# EAGLE board PCB (EAGLE 9.7.0)
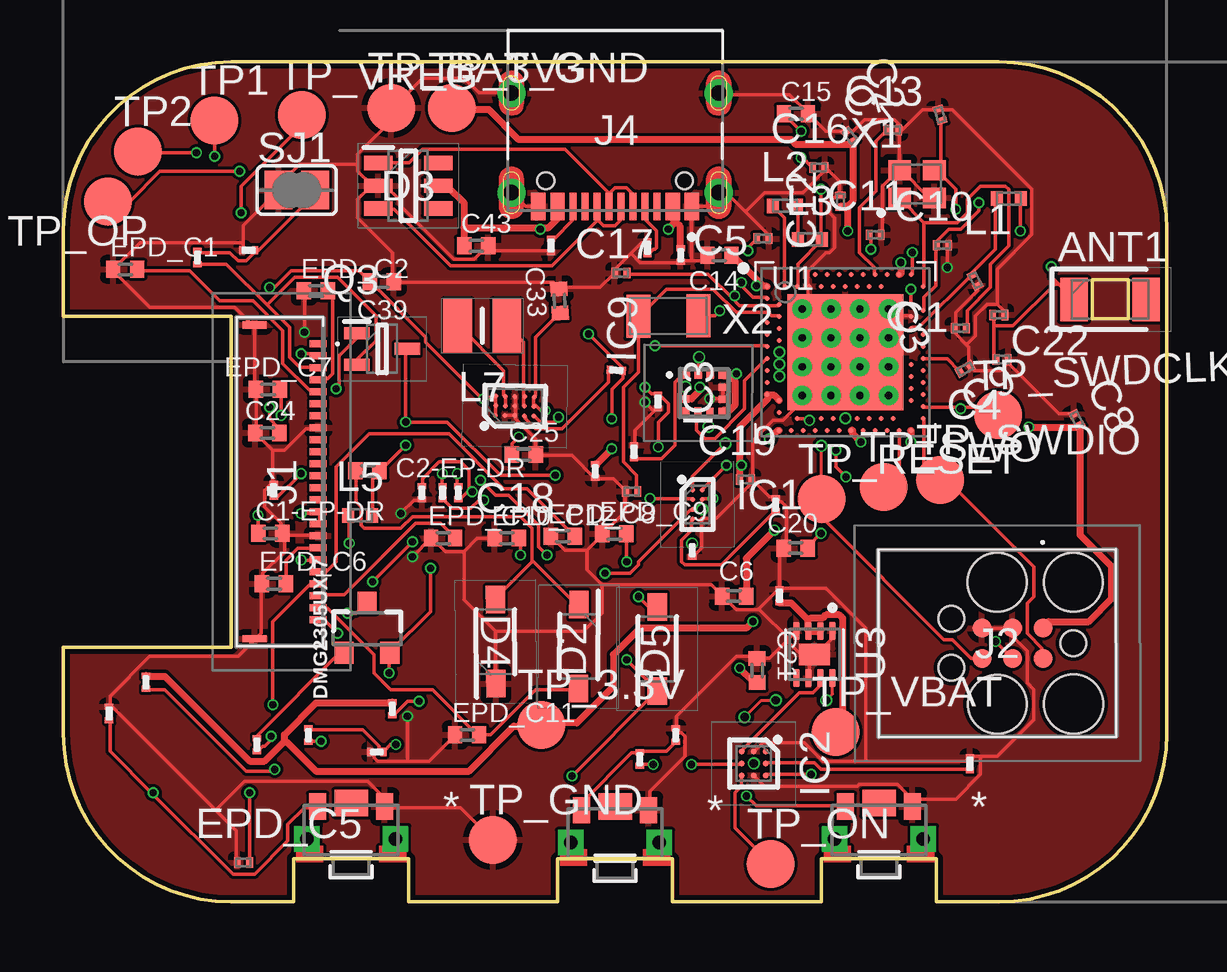
[diagram p0: board, top side]
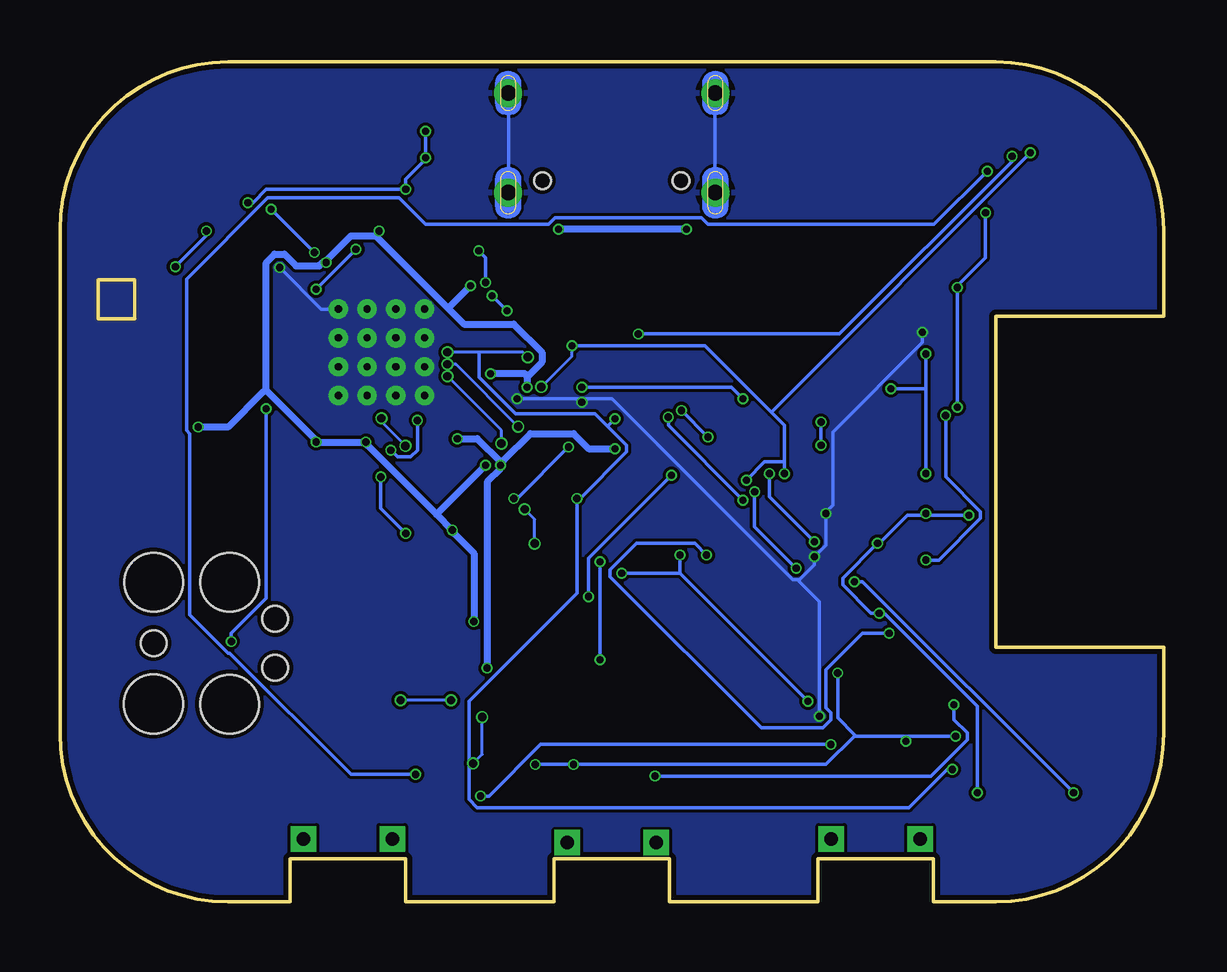
[diagram p1: board, bottom side, seen from below]

Size 46 x 35 mm. Coordinates in mm from the lower left corner, seen from the top.
Outline: 7,35 39,35 arc-90 46,28 46,7 arc-90 39,0 36.4,0 36.4,1.8 31.6,1.8 31.6,0 25.4,0 25.4,1.8 20.6,1.8 20.6,0 14.4,0 14.4,1.8 9.6,1.8 9.6,0 7,0 arc-90 0,7 0,10.6 7,10.6 7,24.4 0,24.4 0,28 arc-90 7,35
Copper layers (1*16): Top 0.035mm / dielectric 1.6mm / Bottom 0.035mm
Design rules "jlcpcb-2layers.dru": minimum track width 5mil, minimum drill 0.3mm, track to track 5mil, track to pad 5mil, pad to pad 5mil, via to via 5mil, smd to smd 5mil, copper to edge 0.2mm, drill to drill 6mil, minimum pad ring 10mil, minimum via ring 3mil, stop-mask expansion 4mil, vias tented up to drill 0mil, thermal gap 10mil
Net classes: 0 default: width 0.15 mm; 1 hi: width 0.3 mm
Milling: 4 lines

## Footprints (pad centres in the part's own frame; a part is rotated, then mirrored left to right if it is on the bottom)
2450AT18B100E_ANTC3216X140N = smd 1.15 x 1.8: 1 -1.5,0; 2 1.5,0
NORDIC_NRF_3_RESC0201_L = smd 0.28 x 0.43: 1 -0.255,0; 2 0.255,0
PERFECT_0402_0402 = smd 0.6 x 0.7: 1 -0.5,0; 2 0.5,0
GRM011R60J152KE01L_1_0201 = smd 0.35 x 0.25: 1 0,0.275; 2 0,-0.275
ESP32_C6_LIBRARY_5_SOD3716X135N = smd 1.15 x 0.8: 1 -1.75,0; 2 1.75,0
ESP32_C6_LIBRARY_3_SOT95P280X145-6N = smd 1.2 x 0.6: 1 -1.25,0.95; 2 -1.25,0; 3 -1.25,-0.95; 4 1.25,-0.95; 5 1.25,0; 6 1.25,0.95
ESP32_C6_LIBRARY_4_ESP32_C6_LIBRARY_4_ESP32_C6_LIBRARY_4_ESP32_C6_LIBRARY_4_ESP32_WROVER_SPARKFUN-DISCRETESEMI_SOT23-3 = smd 0.8 x 0.9: 1 -0.95,-1; 2 0.95,-1; 3 0,1.1
BQ25180YBGR_BGA8C40P2X4_100X155X50 = smd 0.2 x 0.2: A1 -0.2,0.6; A2 0.2,0.6; B1 -0.2,0.2; B2 0.2,0.2; C1 -0.2,-0.2; C2 0.2,-0.2; D1 -0.2,-0.6; D2 0.2,-0.6
DRV2605YZFR_BGA9C50P3X3_144X144X62 = smd 0.25 x 0.25: A1 -0.5,0.5; A2 0,0.5; A3 0.5,0.5; B1 -0.5,0; B2 0,0; B3 0.5,0; C1 -0.5,-0.5; C2 0,-0.5; C3 0.5,-0.5
BMA423_BMA423 = smd 0.3 x 0.35: 1 -0.75,-0.775; 2 -0.25,-0.775; 3 0.25,-0.775; 4 0.75,-0.775; 7 0.75,0.775; 8 0.25,0.775; 9 -0.25,0.775; 10 -0.75,0.775 | smd 0.35 x 0.3: 5 0.775,-0.25; 6 0.775,0.25; 11 -0.775,0.25; 12 -0.775,-0.25
RT6160AWSC_BGA15C40P3X5_140X230X60 = smd 0.216 x 0.216: A1 -0.4,0.8; A2 0,0.8; A3 0.4,0.8; B1 -0.4,0.4; B2 0,0.4; B3 0.4,0.4; C1 -0.4,0; C2 0,0; C3 0.4,0; D1 -0.4,-0.4; D2 0,-0.4; D3 0.4,-0.4; E1 -0.4,-0.8; E2 0,-0.8; E3 0.4,-0.8
503480-2400_5034802400 = smd 0.3 x 0.7: 1 -5.75,1.525; 2 -5.25,1.525; 3 -4.75,1.525; 4 -4.25,1.525; 5 -3.75,1.525; 6 -3.25,1.525; 7 -2.75,1.525; 8 -2.25,1.525; 9 -1.75,1.525; 10 -1.25,1.525; 11 -0.75,1.525; 12 -0.25,1.525; 13 0.25,1.525; 14 0.75,1.525; 15 1.25,1.525; 16 1.75,1.525; 17 2.25,1.525; 18 2.75,1.525; 19 3.25,1.525; 20 3.75,1.525; 21 4.25,1.525; 22 4.75,1.525; 23 5.25,1.525; 24 5.75,1.525 | smd 0.3 x 1: MP1 -6.54,-1.125; MP2 6.54,-1.125
TC2030-IDC_TC2030IDC = smd 0.783 x 0.783: 1 -0.953,-0.635; 2 -0.953,0.635; 3 0.317,-0.635; 4 0.317,0.635; 5 1.588,-0.635; 6 1.588,0.635 | hole 2.451: -2.223,-2.54; -2.223,2.54; 0.952,-2.54; 0.952,2.54 | hole 1.067: -2.223,0; 2.857,-1.016; 2.857,1.016
KH-TYPE-C-16P_KINGHELM_KH-TYPE-C-16P = smd 0.6 x 1.15: A1_B12 -3.2,4.725; A4_B9 -2.4,4.725; A9_B4 2.4,4.725; A12_B1 3.2,4.725 | smd 0.3 x 1.15: A5 -1.25,4.725; A6 -0.25,4.725; A7 0.25,4.725; A8 1.25,4.725; B5 1.75,4.725; B6 0.75,4.725; B7 -0.75,4.725; B8 -1.75,4.725 | drill 0.65 pad 1.05: SH1 -4.32,0; SH2 4.32,0; SH3 -4.32,4.15; SH4 4.32,4.15 | hole 0.7: -2.89,3.65; 2.89,3.65
NORDIC_NRF_2_RESC0402_L = smd 0.5 x 0.6: 1 -0.5,0; 2 0.5,0
MLP2016SR47MT0S1_INDC2016X100N = smd 1.2 x 2.2: 1 -1.028,0; 2 1.028,0
ESP32_C6_LIBRARY_6_SOT65P210X110-3N = smd 1.05 x 0.5: 1 -1.05,0.65; 2 -1.05,-0.65; 3 1.05,0
CPF0201D7K68C1_0201 = smd 0.35 x 0.25: 1 0,0.275; 2 0,-0.275
ESP32_C6_LIBRARY_7_JUMPER_SJ = smd 1.168 x 1.6: 1 -0.762,0; 2 0.762,0
2025-10-22_07-23-44_LIBRARY_SW_EVP-AKE31A_PAN = smd 0.711 x 1.092: 1 -1.4,-0.972; 2 1.4,-0.972 | drill 0.559 pad 0.914 square: 3 -1.848,0.381; 4 1.848,0.381 | smd 1.397 x 1.092: 5 0,-1.124
HECTOR_WATCH_1_TP20R = smd 2 x 2: TP 0,0
NORDIC_NRF_4_AQFN50P700X700X85_HS-74N = smd 4.85 x 4.85: P$74 0,0 | drill 0.3 pad 0.6: P$75 -1.8,1.8; P$76 -0.6,1.8; P$77 0.6,1.8; P$78 1.8,1.8; P$79 -1.8,0.6; P$80 -0.6,0.6; P$81 0.6,0.6; P$82 1.8,0.6; P$83 -1.8,-0.6; P$84 -0.6,-0.6; P$85 0.6,-0.6; P$86 1.8,-0.6; P$87 -1.8,-1.8; P$88 -0.6,-1.8; P$89 0.6,-1.8; P$90 1.8,-1.8 | smd 0.2 x 0.2: P$A8 -1.25,3.25; P$A10 -0.75,3.25; P$A12 -0.25,3.25; P$A14 0.25,3.25; P$A16 0.75,3.25; P$A18 1.25,3.25; P$A20 1.75,3.25; P$A22 2.25,3.25; P$A23 2.75,3.25; P$AA24 3.25,-2.25; P$AB2 -2.75,-2.5; P$AC5 -2,-2.75; P$AC9 -1,-2.75; P$AC11 -0.5,-2.75; P$AC13 0,-2.75; P$AC15 0.5,-2.75; P$AC17 1,-2.75; P$AC19 1.5,-2.75; P$AC21 2,-2.75; P$AC24 3.25,-2.75; P$AD2 -2.75,-3.25; P$AD4 -2.25,-3.25; P$AD6 -1.75,-3.25; P$AD8 -1.25,-3.25; P$AD10 -0.75,-3.25; P$AD12 -0.25,-3.25; P$AD14 0.25,-3.25; P$AD16 0.75,-3.25; P$AD18 1.25,-3.25; P$AD20 1.75,-3.25; P$AD22 2.25,-3.25; P$AD23 2.75,-3.25; P$B1 -3.25,2.75; P$B3 -2.5,2.75; P$B5 -2,2.75; P$B7 -1.5,2.75; P$B9 -1,2.75; P$B11 -0.5,2.75; P$B13 0,2.75; P$B15 0.5,2.75; P$B17 1,2.75; P$B19 1.5,2.75; P$B24 3.25,2.75; P$C1 -3.25,2.25; P$D2 -2.75,2; P$D23 2.75,2; P$E24 3.25,1.75; P$F2 -2.75,1.5; P$F23 2.75,1.5; P$G1 -3.25,1.25; P$H2 -2.75,1; P$H23 2.75,1; P$J1 -3.25,0.75; P$J24 3.25,0.75; P$K2 -2.75,0.5; P$L1 -3.25,0.25; P$L24 3.25,0.25; P$M2 -2.75,0; P$N1 -3.25,-0.25; P$N24 3.25,-0.25; P$P2 -2.75,-0.5; P$P23 2.75,-0.5; P$R1 -3.25,-0.75; P$R24 3.25,-0.75; P$T2 -2.75,-1; P$T23 2.75,-1; P$U1 -3.25,-1.25; P$U24 3.25,-1.25; P$V23 2.75,-1.5; P$W1 -3.25,-1.75; P$W24 3.25,-1.75; P$Y2 -2.75,-2; P$Y23 2.75,-2
ESP32_C6_LIBRARY_SON50P200X200X80-9N = smd 0.76 x 0.27: 1 -0.985,0.75; 2 -0.985,0.25; 3 -0.985,-0.25; 4 -0.985,-0.75; 5 0.985,-0.75; 6 0.985,-0.25; 7 0.985,0.25; 8 0.985,0.75 | smd 0.9 x 1.3: 9 0,0
NORDIC_NRF_BT-XTAL_2016_N = smd 0.95 x 0.85: 1 -0.725,-0.575; 2 0.725,-0.575; 3 0.725,0.575; 4 -0.725,0.575
NORDIC_NRF_1_XTAL_3215_N = smd 1 x 1.8: 1 -1.25,0; 2 1.25,0

## Placement (x,y rotation side)
ANT1  2450AT18B100E  [2450AT18B100E_ANTC3216X140N]  43.63,25.1 0 top
C1  12pF  [NORDIC_NRF_3_RESC0201_L]  37.39,23.9 180 top
C1-EP-DR  10uF  [PERFECT_0402_0402]  8.63,15.36 0 top
C2  12pF  [NORDIC_NRF_3_RESC0201_L]  36.54,32.8 106.3 top
C2-EP-DR  4.7uF/25V  [PERFECT_0402_0402]  12.68,17.96 0 top
C3  1pF  [NORDIC_NRF_3_RESC0201_L]  38.01,25.9 296.8 top
C4  1pF  [NORDIC_NRF_3_RESC0201_L]  39.13,22.6 0 top
C5  100nF  [NORDIC_NRF_3_RESC0201_L]  29.16,27.64 0 top
C6  4.7µF  [PERFECT_0402_0402]  27.96,12.74 180 top
C7  100nF  [NORDIC_NRF_3_RESC0201_L]  32.79,31.9 127.8 top
C8  100nF  [NORDIC_NRF_3_RESC0201_L]  42.24,20.1 117.1 top
C9  820pF  [NORDIC_NRF_3_RESC0201_L]  37.59,22.2 29.3 top
C10  N.C  [NORDIC_NRF_3_RESC0201_L]  36.65,27.36 0 top
C11  100pF  [NORDIC_NRF_3_RESC0201_L]  33.84,27.8 0 top
C12  100nF  [NORDIC_NRF_3_RESC0201_L]  32.39,29.2 90 top
C13  N.C.  [NORDIC_NRF_3_RESC0201_L]  34.57,32.16 0 top
C14  4.7µF  [PERFECT_0402_0402]  27.35,26.94 180 top
C15  1.0µF  [PERFECT_0402_0402]  30.54,32.84 0 top
C16  47nF  [NORDIC_NRF_3_RESC0201_L]  31.49,30.6 0 top
C17  12pF  [NORDIC_NRF_3_RESC0201_L]  23.24,26.2 0 top
C18  12pF  [NORDIC_NRF_3_RESC0201_L]  23.69,17.1 0 top
C19  100nF  [NORDIC_NRF_3_RESC0201_L]  28.44,17.6 0 top
C20  4.7µF  [PERFECT_0402_0402]  30.53,14.74 180 top
C21  4.7µF  [PERFECT_0402_0402]  28.92,9.64 90.4 top
C22  N.C.  [NORDIC_NRF_3_RESC0201_L]  38.99,24.46 0 top
C23  0.1uF  [GRM011R60J152KE01L_1_0201]  24.79,20.85 180 top
C24  10uF  [PERFECT_0402_0402]  8.5,19.54 0 top
C25  22uF  [PERFECT_0402_0402]  19.19,18.64 0 top
C27  0.1uF  [GRM011R60J152KE01L_1_0201]  29.85,12.75 0 top
C29  1uF  [GRM011R60J152KE01L_1_0201]  1.91,7.85 0 top
C30  1uF  [GRM011R60J152KE01L_1_0201]  13.07,6.25 90 top
C31  1uF  [GRM011R60J152KE01L_1_0201]  25.53,6.95 0 top
C32  1uF  [GRM011R60J152KE01L_1_0201]  37.79,5.75 0 top
C33  22uF  [PERFECT_0402_0402]  20.68,25.04 93.1 top
C34  0.1uF  [GRM011R60J152KE01L_1_0201]  14.95,17.05 180 top
C37  1uF  [GRM011R60J152KE01L_1_0201]  26.21,14.65 0 top
C38  1uF  [GRM011R60J152KE01L_1_0201]  22.17,17.95 0 top
C39  10uF  [PERFECT_0402_0402]  13.27,25.84 0 top
C42  0.1uF  [GRM011R60J152KE01L_1_0201]  25.73,26.95 0 top
C43  4.7uF  [PERFECT_0402_0402]  17.21,27.34 0 top
D2  MBR0530  [ESP32_C6_LIBRARY_5_SOD3716X135N]  21.48,10.64 269.7 top
D3  USBLC6-2SC6Y  [ESP32_C6_LIBRARY_3_SOT95P280X145-6N]  14.38,29.84 0 top
D4  MBR0530  [ESP32_C6_LIBRARY_5_SOD3716X135N]  18.02,10.84 90.3 top
D5  MBR0530  [ESP32_C6_LIBRARY_5_SOD3716X135N]  24.76,10.54 90 top
DMG2305UX-7  20V/4.2A/52mΩ/1.4W  [ESP32_C6_LIBRARY_4_ESP32_C6_LIBRARY_4_ESP32_C6_LIBRARY_4_ESP32_C6_LIBRARY_4_ESP32_WROVER_SPARKFUN-DISCRETESEMI_SOT23-3]  12.66,11.38 0 top
EPD_C1  1uF/50V  [PERFECT_0402_0402]  2.58,26.36 0 top
EPD_C2  1uF/50V  [PERFECT_0402_0402]  10.53,25.46 0 top
EPD_C5  0.1uF/50V  [NORDIC_NRF_3_RESC0201_L]  7.51,1.64 0 top
EPD_C6  1uF/50V  [PERFECT_0402_0402]  8.78,13.26 0 top
EPD_C7  1uF/50V  [PERFECT_0402_0402]  8.53,21.36 0 top
EPD_C8  1uF/50V  [PERFECT_0402_0402]  20.82,15.24 0 top
EPD_C9  1uF/50V  [PERFECT_0402_0402]  22.97,15.34 0 top
EPD_C10  1uF/50V  [PERFECT_0402_0402]  15.83,15.16 0 top
EPD_C11  1uF/50V  [PERFECT_0402_0402]  16.83,6.96 0 top
EPD_C12  1uF/50V  [PERFECT_0402_0402]  18.48,15.16 0 top
IC1  BQ25180YBGR  [BQ25180YBGR_BGA8C40P2X4_100X155X50]  26.43,16.56 0.2 top
IC2  DRV2605YZFR  [DRV2605YZFR_BGA9C50P3X3_144X144X62]  28.78,5.77 270 top
IC3  BMA421  [BMA423_BMA423]  26.71,21.2 269.6 top
IC9  RT6160AWSC  [RT6160AWSC_BGA15C40P3X5_140X230X60]  18.82,20.66 88.9 top
J1  503480-2400  [503480-2400_5034802400]  9.1,17.5 270 top
J2  TC2030-IDC  [TC2030-IDC_TC2030IDC]  39.88,10.78 180.1 top
J4  KH-TYPE-C-16P  [KH-TYPE-C-16P_KINGHELM_KH-TYPE-C-16P]  23,33.7 180 top
L1  3.9nH  [NORDIC_NRF_2_RESC0402_L]  39.42,29.3 0 top
L2  10µH  [NORDIC_NRF_2_RESC0402_L]  30.07,29 0 top
L3  15nH  [NORDIC_NRF_2_RESC0402_L]  31.12,27.6 0 top
L5  68uH  [NORDIC_NRF_2_RESC0402_L]  12.37,16.1 0 top
L7  FTC252012SR47MBCA  [MLP2016SR47MT0S1_INDC2016X100N]  17.46,24.01 0 top
Q3  SI1308EDL-T1-GE3  [ESP32_C6_LIBRARY_6_SOT65P210X110-3N]  13.29,23.04 0 top
R1_EP_DR  0.47  [CPF0201D7K68C1_0201]  5.59,26.85 0 top
R1_USB  5K1  [CPF0201D7K68C1_0201]  24.35,27.25 0 top
R2  0  [CPF0201D7K68C1_0201]  15.81,17.05 0 top
R2_EP_DR  10K  [CPF0201D7K68C1_0201]  8.77,17.15 0 top
R2_USB  5K1  [CPF0201D7K68C1_0201]  20.33,27.35 0 top
R3  0  [CPF0201D7K68C1_0201]  23.79,18.75 0 top
R4  0  [CPF0201D7K68C1_0201]  23.05,22.15 265 top
R5  10k  [CPF0201D7K68C1_0201]  10.21,6.95 0 top
R7  10k  [CPF0201D7K68C1_0201]  16.47,17.05 0 top
R8  10k  [CPF0201D7K68C1_0201]  24.03,5.95 0 top
R9  10K  [CPF0201D7K68C1_0201]  29.69,16.55 0 top
R17  3K3  [CPF0201D7K68C1_0201]  3.45,9.15 0 top
R18  3K3  [CPF0201D7K68C1_0201]  13.71,8.05 0 top
R_PWR_EPD  10K  [CPF0201D7K68C1_0201]  8.07,6.55 0 top
R_TYPE_SEL  2.2  [CPF0201D7K68C1_0201]  7.73,27.15 90 top
SJ1  [ESP32_C6_LIBRARY_7_JUMPER_SJ]  9.73,29.66 0 top
SW_DN  2025-10-22_07-23-44_LIBRARY_EVP-AKE31ASW_EVP-AKE31A_PAN  [2025-10-22_07-23-44_LIBRARY_SW_EVP-AKE31A_PAN]  12,3 180 top
SW_ENT  2025-10-22_07-23-44_LIBRARY_EVP-AKE31ASW_EVP-AKE31A_PAN  [2025-10-22_07-23-44_LIBRARY_SW_EVP-AKE31A_PAN]  23,2.85 180 top
SW_UP  2025-10-22_07-23-44_LIBRARY_EVP-AKE31ASW_EVP-AKE31A_PAN  [2025-10-22_07-23-44_LIBRARY_SW_EVP-AKE31A_PAN]  34,3 180 top
TP1  HECTOR_WATCH_1_TPTP20R  [HECTOR_WATCH_1_TP20R]  6.29,32.56 0 top
TP2  HECTOR_WATCH_1_TPTP20R  [HECTOR_WATCH_1_TP20R]  3.11,31.26 0 top
TP_3.3V  HECTOR_WATCH_1_TPTP20R  [HECTOR_WATCH_1_TP20R]  19.92,7.38 0 top
TP_3V3  HECTOR_WATCH_1_TPTP20R  [HECTOR_WATCH_1_TP20R]  16.2,33.08 0 top
TP_BAT_GND  HECTOR_WATCH_1_TPTP20R  [HECTOR_WATCH_1_TP20R]  13.67,33.08 0 top
TP_GND  HECTOR_WATCH_1_TPTP20R  [HECTOR_WATCH_1_TP20R]  17.91,2.58 0 top
TP_ON  HECTOR_WATCH_1_TPTP20R  [HECTOR_WATCH_1_TP20R]  29.48,1.58 0 top
TP_OP  HECTOR_WATCH_1_TPTP20R  [HECTOR_WATCH_1_TP20R]  1.86,29.18 0 top
TP_RESET  HECTOR_WATCH_1_TPTP20R  [HECTOR_WATCH_1_TP20R]  31.61,16.78 0 top
TP_SWDCLK  HECTOR_WATCH_1_TPTP20R  [HECTOR_WATCH_1_TP20R]  38.97,20.28 2.2 top
TP_SWDIO  HECTOR_WATCH_1_TPTP20R  [HECTOR_WATCH_1_TP20R]  36.54,17.58 0 top
TP_SWO  HECTOR_WATCH_1_TPTP20R  [HECTOR_WATCH_1_TP20R]  34.2,17.28 0 top
TP_VBAT  HECTOR_WATCH_1_TPTP20R  [HECTOR_WATCH_1_TP20R]  32.19,7.08 0 top
TP_VREG  HECTOR_WATCH_1_TPTP20R  [HECTOR_WATCH_1_TP20R]  9.95,32.78 0 top
U1  NRF52840_QF  [NORDIC_NRF_4_AQFN50P700X700X85_HS-74N]  32.6,22.9 0 top
U3  MAX17048G+T10  [ESP32_C6_LIBRARY_SON50P200X200X80-9N]  31.31,10.31 270 top
X1  32MHz  [NORDIC_NRF_BT-XTAL_2016_N]  35.59,29.91 0 top
X2  32.768kHz  [NORDIC_NRF_1_XTAL_3215_N]  25.22,24.41 180.3 top

## Library data of the parts
ANT1 = InkTime_v5; ARROW_PART_NUMBER: 2450AT18B100E; ARROW_PRICE-STOCK: https://www.arrow.com/en/products/2450at18b100e/johanson-dielectrics?utm_currency=USD&region=nac; DESCRIPTION: Antennas 2.45GHz ANTENNA; HEIGHT: 1.4mm; MANUFACTURER_NAME: JOHANSON TECHNOLOGY; MANUFACTURER_PART_NUMBER: 2450AT18B100E; MOUSER_PART_NUMBER: 609-2450AT18B100E; MOUSER_PRICE-STOCK: https://www.mouser.co.uk/ProductDetail/Johanson-Technology/2450AT18B100E?qs=yCnrNFeXz%252Bh5MFsFIXGZGA%3D%3D
C1 C1-EP-DR C2 C2-EP-DR C3-C25 C27 C29-C34 C37-C39 C42 C43 EPD_C1 EPD_C2 EPD_C5-EPD_C12 L1-L3 L5 R1_EP_DR R1_USB R2 R2_EP_DR R2_USB R3-R5 R7-R9 R17 R18 R_PWR_EPD R_TYPE_SEL SJ1 TP1 TP2 TP_3.3V TP_3V3 TP_BAT_GND TP_GND TP_ON TP_OP TP_RESET TP_SWDCLK TP_SWDIO TP_SWO TP_VBAT TP_VREG U1 X1 X2 = InkTime_v5
D2 D4 D5 = InkTime_v5; AVAILABILITY: In Stock; CHECK_PRICES: https://www.snapeda.com/parts/MBR0530/Onsemi/view-part/?ref=eda; DESCRIPTION: Diode Schottky 30 V 500mA Surface Mount SOD-123; MF: ON Semiconductor; MP: MBR0530; PACKAGE: SOD-123-2 ON Semiconductor; PRICE: None; PURCHASE-URL: https://www.snapeda.com/api/url_track_click_mouser/?unipart_id=179458&manufacturer=ON Semiconductor&part_name=MBR0530&search_term=None; SNAPEDA_LINK: https://www.snapeda.com/parts/MBR0530/Onsemi/view-part/?ref=snap
D3 = InkTime_v5; AVAILABILITY: In Stock; CHECK_PRICES: https://www.snapeda.com/parts/USBLC6-2SC6Y/STMicroelectronics/view-part/?ref=eda; DESCRIPTION: 17V Clamp 5A (8/20µs) Ipp Tvs Diode Surface Mount SOT-23-6; MF: STMicroelectronics; MP: USBLC6-2SC6Y; PACKAGE: SOT-23-6 STMicroelectronics; PRICE: None; SNAPEDA_LINK: https://www.snapeda.com/parts/USBLC6-2SC6Y/STMicroelectronics/view-part/?ref=snap
DMG2305UX-7 = InkTime_v5; PROD_ID: TRAN-14388
IC1 = InkTime_v5; ARROW_PART_NUMBER: BQ25180YBGR; ARROW_PRICE-STOCK: https://www.arrow.com/en/products/bq25180ybgr/texas-instruments?utm_currency=USD&region=nac; DESCRIPTION: Charger IC Lithium Ion/Polymer, Lithium Iron Phosphate 8-DSBGA (1.6x1.1); HEIGHT: 0.5mm; MANUFACTURER_NAME: Texas Instruments; MANUFACTURER_PART_NUMBER: BQ25180YBGR; MOUSER_PART_NUMBER: 595-BQ25180YBGR; MOUSER_PRICE-STOCK: https://www.mouser.co.uk/ProductDetail/Texas-Instruments/BQ25180YBGR?qs=doiCPypUmgEWjAK%252BJAX6Tw%3D%3D
IC2 = InkTime_v5; ARROW_PART_NUMBER: DRV2605YZFR; ARROW_PRICE-STOCK: https://www.arrow.com/en/products/drv2605yzfr/texas-instruments?region=nac; DESCRIPTION: Haptic Driver for ERM/LRA with Built-In Library and Smart Loop Architecture; HEIGHT: 0.625mm; MANUFACTURER_NAME: Texas Instruments; MANUFACTURER_PART_NUMBER: DRV2605YZFR
IC3 = InkTime_v5; ARROW_PART_NUMBER: BMA423; ARROW_PRICE-STOCK: https://www.arrow.com/en/products/bma423/bosch; DESCRIPTION: Accelerometers Triaxial low-g 12bit Acceleration Sensor; HEIGHT: 1mm; MANUFACTURER_NAME: BOSCH; MANUFACTURER_PART_NUMBER: BMA423; MOUSER_PART_NUMBER: 262-BMA423; MOUSER_PRICE-STOCK: https://www.mouser.co.uk/ProductDetail/Bosch-Sensortec/BMA423?qs=HXFqYaX1Q2xC%252BSgeGoX3mg%3D%3D
IC9 = InkTime_v5; DESCRIPTION: Buck-Boost Regulator Positive Output Step-Up/Step-Down I2C DC-DC Controller IC 15-WL-CSP (BSC) (1.4x2.3); HEIGHT: 0.6mm; MANUFACTURER_NAME: RICHTEK; MANUFACTURER_PART_NUMBER: RT6160AWSC; MOUSER_PART_NUMBER: 835-RT6160AWSC; MOUSER_PRICE-STOCK: https://www.mouser.co.uk/ProductDetail/Richtek/RT6160AWSC?qs=amGC7iS6iy%2FLd9PSoixZXQ%3D%3D
J1 = InkTime_v5; DESCRIPTION: FFC & FPC Connectors 0.5mm FPC RA SMT Dual Contact 24Ckt; HEIGHT: 1.87mm; MANUFACTURER_NAME: Molex; MANUFACTURER_PART_NUMBER: 503480-2400; MOUSER_PART_NUMBER: 538-503480-2400; MOUSER_PRICE-STOCK: https://www.mouser.co.uk/ProductDetail/Molex/503480-2400?qs=OAhjpuo3Vu7efIoxFh9AOw%3D%3D
J2 = InkTime_v5; DESCRIPTION: CABLE ADAPTER 6 POS; HEIGHT: 19mm; MANUFACTURER_NAME: Tag Connect; MANUFACTURER_PART_NUMBER: TC2030-IDC
J4 = InkTime_v5; AVAILABILITY: Not in stock; CHECK_PRICES: https://www.snapeda.com/parts/KH-TYPE-C-16P/Kinghelm/view-part/?ref=eda; MF: kinghelm; MP: KH-TYPE-C-16P; PACKAGE: None; PRICE: None; SNAPEDA_LINK: https://www.snapeda.com/parts/KH-TYPE-C-16P/Kinghelm/view-part/?ref=snap
L7 = InkTime_v5; DESCRIPTION: SMD / SMT Inductors (Coils), L=0.47?H, L x W x T :; HEIGHT: 1mm; JLCPCB: https://jlcpcb.com/partdetail/6763488-FTC252012SR47MBCA/C5832368; MANUFACTURER_NAME: TDK; MANUFACTURER_PART_NUMBER: FTC252012SR47MBCA
Q3 = InkTime_v5; AVAILABILITY: In Stock; CHECK_PRICES: https://www.snapeda.com/parts/SI1308EDL-T1-GE3/Vishay+Siliconix/view-part/?ref=eda; DESCRIPTION: Si1308EDL-T1-GE3 N-channel MOSFET Transistor, 1.5 A, 30 V, 3-Pin SC-70 | Siliconix / Vishay SI1308EDL-T1-GE3; MF: Vishay Siliconix; MP: SI1308EDL-T1-GE3; PACKAGE: SOT-323 Vishay Semiconductor; PRICE: None; PURCHASE-URL: https://www.snapeda.com/api/url_track_click_mouser/?unipart_id=274603&manufacturer=Vishay Siliconix&part_name=SI1308EDL-T1-GE3&search_term=None; SNAPEDA_LINK: https://www.snapeda.com/parts/SI1308EDL-T1-GE3/Vishay+Siliconix/view-part/?ref=snap
SW_DN SW_ENT SW_UP = InkTime_v5; COPYRIGHT: Copyright (C) 2025 Ultra Librarian. All rights reserved.; DIGI-KEY_PART_NUMBER_1: P123437TR-ND; DIGI-KEY_PART_NUMBER_2: P123437CT-ND; DIGI-KEY_PART_NUMBER_3: P123437DKR-ND; MANUFACTURER_NAME: Panasonic; MANUFACTURER_PART_NUMBER: EVP-AKE31A
U3 = InkTime_v5; AVAILABILITY: In Stock; CHECK_PRICES: https://www.snapeda.com/parts/MAX17048G+T10/Analog+Devices/view-part/?ref=eda; DESCRIPTION: 3µA 1-Cell/2-Cell Fuel Gauge with ModelGauge; MF: Analog Devices; MP: MAX17048G+T10; PACKAGE: TDFN-8 Maxim; PRICE: None; PURCHASE-URL: https://www.snapeda.com/api/url_track_click_mouser/?unipart_id=329239&manufacturer=Analog Devices&part_name=MAX17048G+T10&search_term=None; SNAPEDA_LINK: https://www.snapeda.com/parts/MAX17048G+T10/Analog+Devices/view-part/?ref=snap

## Nets
3V3/1.7D: C34.2 DMG2305UX-7.2 IC2.C2 R5.2 R7.2 R8.2 R_PWR_EPD.2
3V3/2.4A [hi]: C6.1 C7.1 C8.1 C12.1 C14.1 C19.1 IC3.3 IC3.7 IC3.10 J2.1 R17.1 R18.1 TP_3.3V.TP TP_3V3.TP U1.P$A22 U1.P$AD14 U1.P$AD23 U1.P$B1 U1.P$W1 U1.P$Y2
ALERT/1.6C: U3.5
ALERT/2.5C: U1.P$J24
D+/1.5D: D3.4
D+/2.7D: U1.P$AD6
D-/1.5D: D3.6
D-/2.7D: U1.P$AD4
DEC1: C5.1 U1.P$C1
DEC3: C11.1 U1.P$D23
DEC4_6: C10.1 C15.1 C16.1 L3.2 U1.P$B5 U1.P$E24
DN: D3.1 J4.A7 J4.B7
DP: D3.3 J4.A6 J4.B6
EPD_3V3: C1-EP-DR.1 DMG2305UX-7.3 EPD_C5.2 J1.15 J1.16 L5.1
EPD_BUSY/1.5D: J1.9
EPD_BUSY/2.2D: U1.P$AD12
EPD_CS/1.4C: J1.12
EPD_CS/2.2D: U1.P$K2
EPD_DC/1.5D: J1.11
EPD_DC/2.2D: U1.P$AD10
EPD_RST/1.5D: J1.10
EPD_RST/2.2D: U1.P$AC11
GDR: J1.2 Q3.1 R2_EP_DR.2
GND: C1-EP-DR.2 C1.2 C2.2 C3.2 C4.2 C5.2 C6.2 C7.2 C8.2 C9.2 C10.2 C11.2 C12.2 C13.2 C14.2 C15.2 C16.2 C17.1 C18.1 C19.2 C20.2 C21.2 C22.2 C23.1 C24.1 C25.2 C27.1 C29.1 C30.1 C31.1 C32.1 C33.2 C34.1 C37.2 C38.2 C39.2 C42.2 C43.2 D3.2 D4.1 EPD_C1.1 EPD_C2.1 EPD_C5.1 EPD_C6.1 EPD_C7.1 EPD_C8.1 EPD_C9.1 EPD_C10.1 EPD_C11.1 EPD_C12.1 IC1.D2 IC2.B1 IC2.B3 IC3.8 IC3.9 IC9.B1 IC9.C1 IC9.C2 IC9.C3 J1.8 J1.17 J1.MP1 J1.MP2 J2.3 J2.5 J4.A1_B12 J4.A12_B1 J4.SH1 J4.SH2 J4.SH3 J4.SH4 R1_USB.1 R2_EP_DR.1 R2_USB.2 R3.1 R9.1 R_TYPE_SEL.1 SJ1.1 SW_DN.1 SW_ENT.1 SW_UP.1 TP_BAT_GND.TP TP_GND.TP U1.P$74 U1.P$75 U1.P$76 U1.P$77 U1.P$78 U1.P$79 U1.P$80 U1.P$81 U1.P$82 U1.P$83 U1.P$84 U1.P$85 U1.P$86 U1.P$87 U1.P$88 U1.P$89 U1.P$90 U1.P$B7 U1.P$F23 U3.1 U3.4 U3.6 U3.9 X1.2 X1.4
HAPTIC_EN/1.4C: IC2.A1
HAPTIC_EN/2.6A: U1.P$U1
IMU_INT1: IC3.5 U1.P$N1
IMU_INT2: IC3.6 U1.P$P2
LX1: IC9.B2 IC9.B3 L7.1
LX2: IC9.D2 IC9.D3 L7.2
MOSI/1.5B: J1.14
MOSI/2.2D: U1.P$B13
N$1: IC9.D1 R4.2
N$2: IC9.E1 R2.2
N$3: IC1.D1 R9.2
N$6: C25.1 C33.1 IC9.E2 IC9.E3
N$7: L2.1 U1.P$B3
N$8: C20.1 U1.P$AC5
N$9: IC3.1 R3.2
N$10: L2.2 L3.1
N$11: C2.1 U1.P$A23 X1.3
N$12: C13.1 U1.P$A18
N$13: C9.1 U1.P$N24
N$14: C2-EP-DR.2 D5.2 L5.2 Q3.3
N$15: C1.1 U1.P$B24 X1.1
N$16: C3.1 L1.1 U1.P$H23
N$17: ANT1.1 C4.1 C22.1 L1.2
N$18: C2-EP-DR.1 D2.1 D4.2
N$19: EPD_C6.2 J1.18
N$20: R1_EP_DR.1 R_TYPE_SEL.2 SJ1.2
N$21: EPD_C2.2 J1.4
N$22: EPD_C1.2 J1.5
N$23: EPD_C7.2 J1.19
N$24: EPD_C8.2 J1.20
N$25: C32.2 IC2.A2
N$26: EPD_C10.2 J1.22
N$27: J4.A5 R1_USB.2
N$28: EPD_C12.2 J1.24
N$33: J4.B5 R2_USB.1
OUT+: IC2.A3 TP_OP.TP
OUT-: IC2.C3 TP_ON.TP
P0.00/XL1: C17.2 U1.P$D2 X2.1
P0.01/XL2: C18.2 U1.P$F2 X2.2
P0.04: U1.P$J1
P0.09: U1.P$L24
P0.13/1.5D: C30.2 R5.1 SW_UP.2
P0.13/2.6C: U1.P$AD8
P0.14/1.5D: C31.2 R8.1 SW_ENT.2
P0.14/2.7C: U1.P$AC9
P0.19: U1.P$AC15
P0.20: U1.P$AD16
P0.21: U1.P$AC17
P0.22: U1.P$AD18
P0.23: U1.P$AC19
P0.24: U1.P$AD20
P0.25: U1.P$AC21
P0.26: U1.P$G1
P0.27: U1.P$H2
P0.28: U1.P$B11
P0.29: U1.P$A10
P0.30: U1.P$B9
P0.31: U1.P$A8
P1.01/1.6C: DMG2305UX-7.1 R_PWR_EPD.1
P1.01/2.4B: U1.P$Y23
P1.02/1.6C: C29.2 R7.1 SW_DN.2
P1.02/2.8C: U1.P$W24
P1.03: U1.P$V23
P1.04: U1.P$U24
P1.05: U1.P$T23
P1.06: U1.P$R24
P1.07: U1.P$P23
P1.09: U1.P$R1
P1.10: U1.P$A20
P1.11: U1.P$B19
P1.12: U1.P$B17
P1.13: U1.P$A16
P1.14: U1.P$B15
P1.15: U1.P$A14
PMIC_INT: IC1.A1 U1.P$T2
PREVGH: D5.1 EPD_C9.2 J1.21
PREVGL: D2.2 EPD_C11.2 J1.23
RESE: J1.3 Q3.2 R1_EP_DR.2
RESET: J2.6 TP_RESET.TP U1.P$AC13
SCK/1.5B: J1.13
SCK/2.2D: U1.P$A12
SCL/1.4C: IC2.C1 U3.7
SCL/2.4C: IC1.B1 IC3.12 R4.1 R17.2 TP1.TP U1.P$M2
SDA/1.4C: IC2.B2 U3.8
SDA/2.4C: IC1.C1 IC3.2 R2.1 R18.2 TP2.TP U1.P$L1
SWDCLK: J2.4 TP_SWDCLK.TP U1.P$AA24
SWDIO: J2.2 TP_SWDIO.TP U1.P$AC24
SWO: TP_SWO.TP U1.P$AD22
VBAT/1.2A [hi]: C27.2 TP_VBAT.TP U3.2 U3.3
VBAT/2.5C [hi]: C37.1 IC1.C2
VBUS/1.5D [hi]: C42.1 C43.1 D3.5 J4.A4_B9 J4.A9_B4
VBUS/2.6D [hi]: C21.1 C38.1 IC1.A2 U1.P$AD2
VREG: C23.2 C24.2 C39.1 IC1.B2 IC9.A1 IC9.A2 IC9.A3 TP_VREG.TP

## Tracks (layer width: path | path; a pad name or v marks a point on that pad's centre or on a via)
3V3/1.7D  (via drill 0.3)
  Top 0.15: 16.91,17.15 16.91,17.98 16.56,18.33 15.66,18.33 14.97,17.64 14.97,17.36 C34.2 | 16.91,17.15 16.49,16.74 R7.2 | v26.19,5.73 28.26,5.73 IC2.C2 | v24.59,5.73 24.04,5.73 R8.2 | v8.66,6.9 8.66,6.77 8.39,6.49 8.32,6.49 8.11,6.28 R_PWR_EPD.2 | v10.74,6.7 10.26,6.7 R5.2 | v13.58,9.54 13.58,10.37 DMG2305UX-7.2 13.65,10.44 15.31,12.1 v15.31,13.9 | v17.05,17.09 16.98,17.15 16.91,17.15
  Bottom 0.15: v26.19,5.73 v24.59,5.73 14.07,5.73 12.89,6.9 | 12.89,6.9 10.74,6.9 | 10.74,6.9 v8.66,6.9 | 10.74,6.9 v10.74,6.7 | v13.58,9.54 13.58,7.67 12.89,6.97 12.89,6.9 | v17.05,17.09 17.05,15.63 v15.31,13.9
3V3/2.4A  (via drill 0.3)
  Top 0.3: 9.22,6.7 9.22,6.97 10.54,8.29 13.65,8.29 R18.1 | 9.22,6.7 8.39,5.87 7.77,5.87 4.23,9.4 3.47,9.4 R17.1 | 9.22,6.7 9.36,6.63 10.54,5.45 16.91,5.45 18.78,7.32 19.88,7.32 TP_3.3V.TP 20.02,7.46 21.41,7.46 22.93,8.98 22.93,10.3 24.04,11.41 28.47,11.41 v28.75,11.68 | J2.1 40.87,11.47 41.07,11.68 42.74,11.68 43.71,12.65 43.71,13.97 42.39,15.28 42.39,19.85 C8.1 42.25,19.79 v40.24,19.79 | 29.37,21.1 29.65,21.1 29.79,20.96 U1.P$Y2 | 29.37,21.1 U1.P$W1 | 28.19,18.19 28.19,19.79 29.37,20.96 29.37,21.1 | 28.19,18.19 28.19,17.64 C19.1 | 32.7,28.99 32.42,28.99 C12.1 | 32.7,28.99 32.9,29.2 32.9,31.56 | 32.9,31.56 32.9,31.7 C7.1 | 28.99,25.84 27.92,26.92 C14.1 | 28.99,25.84 29.16,25.67 29.3,25.67 U1.P$B1 | 27.88,21.83 27.78,21.93 27.5,21.93 IC3.10 | 27.88,21.83 27.99,21.72 27.99,20.69 27.78,20.48 27.5,20.48 IC3.7 | v33.25,19.16 32.9,19.51 32.9,19.65 U1.P$AD14 | v35.33,19.16 35.33,19.65 U1.P$AD23 | v34.91,26.64 34.91,26.16 U1.P$A22 | v26.53,21.45 26.53,21.31 26.19,20.96 25.98,20.96 IC3.3 | v29.65,15.49 28.47,14.31 28.47,12.79 C6.1 | v28.05,22 27.88,21.83 | v28.89,25.67 28.89,25.74 28.99,25.84 | v32.7,27.96 32.7,28.99 | 32.9,31.56 30.55,31.56 30.34,31.77 18.98,31.77 17.74,33.01 16.21,33.01 TP_3V3.TP | v28.26,18.19 28.19,18.19
  Bottom 0.3: 37.4,21.31 37.4,26.64 37.06,26.99 36.64,26.99 36.16,26.5 35.19,26.5 35.05,26.64 v34.91,26.64 34.84,26.78 33.87,27.75 32.83,27.75 | 37.4,21.31 35.4,19.3 v35.33,19.16 v33.25,19.16 33.18,19.02 30.31,16.15 | 26.53,21.86 v26.53,21.45 | 26.53,21.86 25.91,22.49 25.91,22.9 27.09,24.08 29.16,24.08 29.82,24.74 | 32.83,27.75 29.82,24.74 | 30.31,16.15 v29.65,15.49 29.58,15.35 28.75,14.52 v28.75,11.68 | v28.05,22 26.6,22 26.53,21.86 | 29.82,24.74 v28.89,25.67 | v32.7,27.96 32.76,27.89 32.83,27.75 | 30.31,16.15 v28.26,18.19 | v40.24,19.79 39,19.79 37.54,21.24 37.4,21.31
DEC1  (via drill 0.3)
  Top 0.15: v28.26,25.81 28.26,25.67 28.75,25.19 29.3,25.19 U1.P$C1 | v28.54,27.13 28.54,27.26 28.89,27.61 C5.1
  Bottom 0.15: v28.26,25.81 28.26,26.85 v28.54,27.13
DEC3  (via drill 0.3)
  Top 0.15: v35.33,25.53 35.33,24.91 U1.P$D23 | v33.66,27.2 33.66,27.68 33.59,27.75 C11.1
  Bottom 0.15: v33.66,27.2 v35.33,25.53
DEC4_6  (via drill 0.3)
  Top 0.15: U1.P$E24 35.88,24.7 35.88,25.19 36.37,25.67 36.37,27.33 C10.1 36.43,27.4 36.43,27.54 36.92,28.03 37.4,28.03 38.17,28.79 v38.17,29.13 | U1.P$B5 30.62,25.67 30.62,26.57 31.59,27.54 L3.2 31.59,27.61 v31.59,29.69 | v30.76,31 30.82,31 31.17,30.66 C16.1 | v30.76,32.11 30.06,32.8 C15.1
  Bottom 0.15: v30.76,32.11 v30.76,31 30.76,30.93 31.59,30.1 v31.59,29.69 37.4,29.69 37.96,29.13 v38.17,29.13
DN
  Top 0.15: J4.B7 23.69,28.99 23.69,29.55 23.48,29.76 23,29.76 22.79,29.55 22.79,28.99 J4.A7 22.72,29.55 20.92,31.35 14.97,31.35 14.41,30.8 13.17,30.8 D3.1
DP
  Top 0.15: 22.31,28.37 22.31,28.93 J4.B6 | 22.31,28.37 22.52,28.16 23,28.16 23.21,28.37 23.21,28.93 J4.A6 | D3.3 13.17,28.86 13.79,28.86 16.14,26.5 20.37,26.5 22.24,28.37 22.31,28.37
EPD_3V3  (via drill 0.3)
  Top 0.15: J1.16 10.67,15.77 10.67,16.18 J1.15 10.6,16.18 v9.91,16.18 | v7.77,4.55 EPD_C5.2 | v11.85,12.03 12.2,12.03 12.61,12.45 DMG2305UX-7.3 | v11.92,14.94 11.92,16.05 L5.1 | v8.11,16.11 8.11,15.42 C1-EP-DR.1
  Bottom 0.15: v7.77,4.55 7.77,8.15 11.64,12.03 v11.85,12.03 12.2,12.03 13.37,13.21 13.37,13.48 v11.92,14.94 11.85,14.94 10.67,16.11 9.91,16.11 | 9.91,16.11 v8.11,16.11 | v9.91,16.18 9.91,16.11
GDR  (via drill 0.3)
  Top 0.15: v9.91,17.85 8.94,16.88 8.8,16.88 R2_EP_DR.2 | v9.91,22.83 10.54,22.83 10.6,22.76 J1.2 | v11.37,21.38 11.51,21.52 11.51,22.76 12.2,23.45 12.2,23.66 Q3.1
  Bottom 0.15: v9.91,22.83 9.91,21.38 | 9.91,21.38 v9.91,17.85 | 9.91,21.38 v11.37,21.38
GND  (via drill 0.3)
  Top 0.15: 14.34,5.87 15.24,5.87 16.28,6.9 EPD_C11.1 | 14.34,5.87 13.1,5.87 12.96,6.01 12.96,6.07 12.82,6.21 C30.1 | 24.63,20.44 24.73,20.55 C23.1 | 24.63,20.44 23.83,19.65 23.83,19.09 R3.1 | IC3.9 27.5,21.38 27.5,20.96 IC3.8 27.43,20.96 v26.95,20.96 | v14.07,16.18 14.62,16.74 14.9,16.74 C34.1 | v14.55,14.38 15.31,15.15 EPD_C10.1 15.38,15.15 15.94,14.59 16.7,14.59 | 16.7,14.59 17.25,15.15 17.95,15.15 EPD_C12.1 | v10.05,23.73 10.05,25.39 EPD_C2.1 | 18.01,11.27 18.01,9.12 D4.1 | 18.01,11.27 16.7,12.58 16.7,14.59 | v24.25,20.82 24.63,20.44 | v14.34,7.74 14.34,5.87 | IC2.B3 28.82,5.24 29.23,4.83 33.11,4.83 33.18,4.9 34.77,4.9 35.4,4.27 35.4,4 SW_UP.1 35.47,4.27 37.2,4.27 38.23,5.31 38.23,6.07 | J2.5 38.3,11.41 J2.3 39.55,11.34 39.55,11.06 40.17,10.44 40.17,9.12 40.45,8.84 40.45,7.6 38.93,6.07 38.23,6.07 | 33.46,5.87 37.61,5.87 37.75,6.01 C32.1 37.82,6.07 38.23,6.07 | 33.46,5.87 31.66,5.87 30.89,6.63 29.16,6.63 28.82,6.28 IC2.B1 | v36.85,26.43 36.85,27.33 C10.2 | U1.P$83 30.82,22.35 30.82,23.45 U1.P$79 30.82,23.52 31.38,24.08 U1.P$74 | U1.P$F23 35.33,24.43 34.63,24.43 34.43,24.63 U1.P$74 | 30.82,24.7 31.03,24.91 31.03,25.6 U1.P$B7 31.03,25.67 31.03,26.3 31.8,27.06 31.93,27.06 32.14,27.26 32.14,28.51 31.93,28.72 31.93,29.13 32.28,29.48 C12.2 32.35,29.48 32.35,30.03 31.8,30.59 C16.2 31.8,30.52 30.82,29.55 29.23,29.55 28.44,28.75 | U1.P$74 31.93,21.1 30.82,21.1 U1.P$87 30.76,21.03 30.76,20.82 29.99,20.06 29.58,20.06 28.75,19.23 28.75,17.64 C19.2 | 30.82,24.7 U1.P$75 | 30.82,24.7 U1.P$74 | U1.P$88 U1.P$74 | U1.P$84 32,22.35 32.35,22.35 U1.P$74 | U1.P$89 33.25,21.1 34.36,21.1 U1.P$74
  Top 0.15: U1.P$85 33.18,22.35 U1.P$74 | U1.P$80 32,23.52 U1.P$74 | U1.P$76 31.93,24.63 31.45,24.15 U1.P$74 | U1.P$81 33.25,23.52 U1.P$74 | U1.P$77 33.25,24.63 33.8,24.08 U1.P$74 | U1.P$90 34.43,21.1 U1.P$74 | U1.P$86 34.36,22.28 33.8,21.72 U1.P$74 | U1.P$82 34.36,23.52 33.87,24.01 U1.P$74 | U1.P$78 34.43,24.7 U1.P$74 | IC9.C1 18.84,20.27 18.84,20.62 IC9.C2 18.84,20.69 18.84,21.03 IC9.C3 | IC9.B1 18.43,20.27 18.78,20.27 IC9.C1 | IC9.C1 18.84,20.2 18.84,20.13 19.68,19.3 19.68,18.68 C25.2 19.75,18.61 21.2,18.61 22.17,17.64 C38.2 22.24,17.64 22.93,17.64 23.41,17.15 C18.1 23.41,17.09 23.41,16.25 22.52,15.35 EPD_C9.1 22.45,15.28 21.82,14.66 | 21.82,14.66 20.92,14.66 20.37,15.21 EPD_C8.1 | C37.2 26.25,14.38 26.6,14.73 26.6,15.91 IC1.D2 26.67,15.98 27.22,15.98 28.75,17.5 C19.2 | C19.2 28.75,17.57 29.44,16.88 29.65,16.88 R9.1 29.72,16.81 29.86,16.67 29.93,16.67 30.13,16.46 30.13,14.87 30.06,14.8 C20.2 29.99,14.73 29.86,14.59 29.86,13.07 C27.1 | SW_ENT.1 24.45,3.86 24.45,4.62 25.91,6.07 25.91,6.9 25.77,7.04 25.7,7.04 25.56,7.18 C31.1 25.56,7.25 25.56,7.74 28.05,10.23 28.95,10.23 C21.2 28.95,10.16 29.44,10.16 30.17,10.89 | 28.95,12.17 28.05,12.17 27.5,12.72 C6.2 27.43,12.79 27.02,13.21 22.45,13.21 | 28.95,12.17 29.79,13 C27.1 | 30.24,10.96 30.55,11.27 U3.4 | 30.24,10.96 30.17,10.89 | U3.6 31.1,9.33 31.1,10.09 31.31,10.3 U3.9 | U3.1 32,11.27 32,10.92 31.38,10.3 U3.9 | 30.17,10.89 31.03,10.02 U3.9 | 30.24,10.96 29.02,12.17 28.95,12.17 | 21.82,14.66 21.82,13.83 22.45,13.21 | 33.46,5.87 33.46,11.41 31.8,13.07 29.93,13.07 C27.1 | 18.01,11.27 21.68,11.27 22.45,12.03 22.45,13.21 | 8.73,18.82 8.73,17.43 R2_EP_DR.1 8.66,17.43 8.39,17.15 8.39,16.46 9.08,15.77 9.08,15.42 C1-EP-DR.2
  Top 0.15: 8.73,18.82 8.04,19.51 C24.1 8.04,19.58 8.04,21.31 EPD_C7.1 7.97,21.38 7.97,24.01 J1.MP1 7.9,24.01 7.14,24.77 3.61,24.77 2.09,26.3 EPD_C1.1 3.2,27.47 7.49,27.47 | 8.73,18.82 9.22,18.82 10.12,19.72 10.6,19.72 J1.8 | TP_GND.TP 17.88,2.61 16.56,3.93 13.44,3.93 SW_DN.1 13.37,4 13.37,4.34 12.68,5.04 7.56,5.04 6.34,3.82 | J1.17 10.6,15.28 9.22,15.28 9.15,15.35 C1-EP-DR.2 | 6.34,3.82 2.02,8.15 C29.1 1.95,8.15 1.95,8.57 3.61,10.23 7.28,10.23 7.97,10.92 J1.MP2 8.04,10.99 8.25,11.2 8.25,13.21 EPD_C6.1 8.32,13.28 8.32,13.69 9.22,14.59 9.22,15.21 C1-EP-DR.2 | 6.34,3.82 7.21,2.96 7.21,1.64 EPD_C5.1 | 7.49,27.47 7.49,28.16 8.94,29.62 SJ1.1 9.01,29.69 9.01,29.9 9.84,30.73 12.27,30.73 | 7.49,27.47 7.49,27.2 R_TYPE_SEL.1 | J4.A12_B1 19.75,28.99 19.26,28.99 18.71,29.55 J4.SH4 | R2_USB.2 20.3,27.13 17.95,27.13 17.74,27.33 C43.2 17.67,27.33 17.11,26.78 16.28,26.78 14,29.06 14,29.27 13.44,29.83 13.17,29.83 D3.2 | D3.2 13.1,29.83 12.82,29.83 12.27,29.27 12.27,28.51 13.72,27.06 13.72,25.88 C39.2 13.79,25.81 20.44,25.81 20.65,25.6 C33.2 20.71,25.6 22.38,25.6 22.93,26.16 C17.1 23,26.23 23,26.36 23.66,27.02 | 12.27,30.73 12.27,30.45 12.82,29.9 D3.2 | 12.27,30.73 12.27,31.14 13.65,32.53 13.65,33.01 TP_BAT_GND.TP 13.72,33.08 14.97,34.33 16.7,34.33 17.32,33.7 18.64,33.7 J4.SH2 | 23.66,27.02 24.11,27.47 24.32,27.47 R1_USB.1 | 26.19,26.71 26.6,26.71 26.81,26.92 C14.2 | 26.19,26.71 25.77,26.71 C42.2 25.7,26.64 24.04,26.64 23.66,27.02 | 26.19,26.71 26.19,28.93 J4.A1_B12 26.25,28.99 26.81,28.99 27.29,29.48 J4.SH3 27.36,29.55 27.64,29.55 28.44,28.75 | 28.44,28.75 29.37,27.82 29.37,27.68 C5.2
  Top 0.15: 37.65,23.21 37.2,23.66 37.2,23.87 C1.2 37.2,23.94 37.2,24.56 38.1,25.46 38.1,25.67 C3.2 | 37.65,23.21 37.75,23.11 37.75,22.35 C9.2 37.82,22.28 37.96,22.14 39.07,22.14 39.34,22.42 39.34,22.55 C4.2 39.41,22.42 41.49,20.34 C8.2 | 38.93,24.91 39.2,24.63 39.2,24.49 C22.2 | 38.93,24.91 38.51,24.91 38.03,24.43 38.03,23.59 37.65,23.21 | C11.2 34.15,27.82 34.15,29.83 34.84,30.52 X1.4 | X1.4 34.84,30.59 34.84,32.11 C13.2 34.91,32.11 35.02,32.22 | 35.02,32.22 35.81,33.01 36.43,33.01 C2.2 36.5,33.01 37.06,33.01 40.38,29.69 40.38,27.82 38.93,26.36 38.93,24.91 | X1.2 36.3,29.34 36.09,29.34 34.91,30.52 X1.4 | 35.02,32.22 34.63,32.6 33.39,32.6 32.9,32.11 32.7,32.11 C7.2 32.63,32.11 31.8,32.11 31.1,32.8 C15.2 31.03,32.87 30.27,33.64 27.36,33.64 J4.SH1
  Bottom 0.15: 24.25,20.96 23,20.96 15.45,13.41 15.18,13.41 | 24.25,20.96 v26.95,20.96 | 15.18,13.41 14.55,14.04 v14.55,14.38 14.07,14.87 v14.07,16.18 14.07,16.25 13.79,16.53 13.79,19.58 10.05,23.32 v10.05,23.73 | v24.25,20.82 24.25,20.96 | v14.34,7.74 14.34,12.51 15.18,13.34 15.18,13.41 | v36.85,26.43 35.12,24.7 34.43,24.7 U1.P$78 | J4.SH4 18.71,29.62 18.71,33.64 J4.SH2 | J4.SH1 27.29,33.64 27.29,29.62 J4.SH3
  pour Top: 56.82,46.67 56.77,46.72 -5.62,46.72 -5.64,46.74 -6.02,47.12 -6.02,-2.32 56.82,-2.32
  pour Bottom: -4.52,-1.22 57.72,-1.22 57.72,49.27 57.67,49.32 0.23,49.32 -4.52,44.57
IMU_INT1
  Top 0.15: U1.P$N1 29.3,22.62 28.4,21.72 28.4,20.55 27.16,19.3 26.74,19.3 26.39,19.65 26.39,20.41 IC3.5
IMU_INT2  (via drill 0.35 pad 0.5)
  Top 0.127: IC3.6 26.95,19.86 v26.9,19.8
  Bottom 0.127: v26.9,19.8 29.5,22.4 U1.P$P2
  other vias: 29.85,22.4
LX1
  Top 0.15: IC9.B2 18.43,20.69 18.43,21.03 IC9.B3 18.36,21.1 18.36,22.14 16.49,24.01 L7.1
LX2
  Top 0.15: IC9.D2 19.19,20.69 19.19,21.03 IC9.D3 19.19,21.1 19.19,23.32 L7.2
N$1
  Top 0.15: IC9.D1 19.26,20.2 19.26,20.13 19.68,19.72 20.78,19.72 22.72,21.66 22.72,22.14 R4.2
N$2  (via drill 0.3)
  Top 0.15: v20.65,20.2 20.44,19.99 19.88,19.99 19.68,20.2 IC9.E1 | v17.53,16.74 17.32,16.74 16.98,16.39 16.21,16.39 15.87,16.74 R2.2
  Bottom 0.15: v20.65,20.2 20.65,19.85 v17.53,16.74
N$3
  Top 0.15: IC1.D1 26.19,15.91 26.19,15.49 25.77,15.08 25.77,14.18 25.91,14.04 27.43,14.04 29.65,16.25 R9.2
N$6  (via drill 0.3)
  Top 0.15: C33.1 20.65,24.49 19.68,23.52 19.68,21.1 IC9.E3 19.61,21.03 19.61,20.69 IC9.E2 19.68,20.69 19.88,20.48 v20.09,20.48 | v18.98,19.37 18.71,19.09 18.71,18.68 C25.1
  Bottom 0.15: v20.09,20.48 v18.98,19.37
N$7
  Top 0.15: U1.P$B3 30.06,25.67 30.06,28.51 L2.1
N$8  (via drill 0.3)
  Top 0.15: v31.1,20.06 31.03,20.13 30.62,20.13 U1.P$AC5 | v32.21,18.82 32.21,18.12 v32.63,17.71 | v31.59,15.35 31.03,14.8 C20.1
  Bottom 0.15: v31.1,20.06 31.1,18.82 31.38,18.54 31.93,18.54 v32.21,18.82 | v32.63,17.71 32.63,16.39 v31.59,15.35
N$9
  Top 0.15: R3.2 23.83,18.47 24.94,18.47 25.49,19.02 25.49,21.66 25.77,21.93 25.91,21.93 IC3.1
N$10
  Top 0.15: L2.2 30.62,28.99 30.62,27.61 L3.1
N$11  (via drill 0.3)
  Top 0.15: v35.4,27.06 35.4,26.16 U1.P$A23 | v37.2,28.86 37.2,29.69 36.37,30.52 X1.3 36.37,30.59 36.57,30.8 36.57,32.53 C2.1
  Bottom 0.15: v37.2,28.86 v35.4,27.06
N$12
  Top 0.15: U1.P$A18 33.8,26.16 33.8,26.43 33.18,27.06 33.18,28.93 33.87,29.62 33.87,31.7 34.29,32.11 C13.1
N$13
  Top 0.15: U1.P$N24 35.88,22.62 36.85,22.62 37.34,22.14 C9.1
N$14  (via drill 0.3)
  Top 0.15: L5.2 12.89,16.11 12.89,17.64 13.17,17.91 C2-EP-DR.2 13.24,17.98 v14.27,19.02 | Q3.3 14.27,23.04 v14.27,19.99 16.01,19.99 18.22,17.78 v20.51,17.78 | v23.97,12.72 24.39,12.31 24.73,12.31 D5.2
  Bottom 0.15: v14.27,19.02 v14.27,19.99 | v23.97,12.72 23.97,14.31 v20.51,17.78
N$15
  Top 0.15: 35.88,28.3 35.88,25.67 U1.P$B24 | 35.88,28.3 34.91,29.27 X1.1 | 35.88,28.3 37.27,28.3 37.68,28.72 37.68,29.27 38.23,29.83 39.27,29.83 39.41,29.69 39.41,27.33 38.65,26.57 38.65,25.6 37.68,24.63 37.68,23.94 C1.1
N$16
  Top 0.15: U1.P$H23 35.4,23.94 35.67,23.94 37.89,26.16 C3.1 37.89,26.23 38.86,27.2 38.86,29.27 L1.1
N$17  (via drill 0.3)
  Top 0.15: 38.79,24.01 38.79,22.69 38.86,22.62 C4.1 | 38.79,24.01 38.79,24.43 C22.1 | v39.9,27.96 39.9,29.27 L1.2 | v41.19,26.46 41.19,26.04 41.49,25.74 | 41.49,25.74 42.11,25.12 ANT1.1 | 38.79,24.01 39.59,24.01 41.32,25.74 41.49,25.74
  Bottom 0.15: v41.19,26.46 39.9,27.76 v39.9,27.96
N$18
  Top 0.15: 19.54,14.18 19.54,15.56 19.05,16.05 14.55,16.05 14.07,15.56 12.54,15.56 12.4,15.7 12.4,16.46 12.2,16.67 12.2,17.91 C2-EP-DR.1 | 19.54,14.18 18.01,12.65 D4.2 | D2.1 21.48,12.45 21.34,12.45 19.61,14.18 19.54,14.18
N$19
  Top 0.15: EPD_C6.2 9.29,13.28 9.29,14.25 9.77,14.73 10.6,14.73 J1.18
N$20
  Top 0.15: R1_EP_DR.1 5.62,27.06 6.93,27.06 7.28,26.71 7.63,26.71 8.04,27.13 R_TYPE_SEL.2 8.11,27.13 10.47,29.48 10.47,29.62 SJ1.2
N$21
  Top 0.15: J1.4 10.67,21.79 11.02,21.79 11.23,22 11.23,25.26 11.09,25.39 EPD_C2.2
N$22
  Top 0.15: EPD_C1.2 3.12,26.3 5.27,26.3 6.52,25.05 7.9,25.05 9.15,23.8 9.15,22.42 10.26,21.31 10.6,21.31 J1.5
N$23  (via drill 0.3)
  Top 0.15: v9.08,20.27 9.08,21.31 EPD_C7.2 | v9.91,14.25 10.6,14.25 J1.19
  Bottom 0.15: v9.08,20.27 9.08,17.71 7.63,16.25 7.63,15.98 9.36,14.25 v9.91,14.25
N$24
  Top 0.15: J1.20 10.67,13.76 10.95,13.76 11.37,14.18 11.37,18.12 12.75,19.51 16.07,19.51 18.36,17.22 19.33,17.22 21.27,15.28 EPD_C8.2
N$25
  Top 0.15: IC2.A2 29.3,5.8 31.31,5.8 31.59,5.52 37.75,5.52 C32.2
N$26
  Top 0.15: J1.22 10.67,12.79 11.71,12.79 14.69,15.77 15.73,15.77 16.28,15.21 EPD_C10.2
N$27
  Top 0.15: R1_USB.2 24.39,26.99 24.59,27.2 24.66,27.2 24.73,27.26 24.73,27.96 24.32,28.37 24.32,28.93 J4.A5
N$28  (via drill 0.3)
  Top 0.15: v11.44,11.2 10.95,11.68 10.67,11.68 J1.24 | v19.05,14.45 19.05,15.08 18.98,15.15 EPD_C12.2
  Bottom 0.15: v11.44,11.2 12.54,11.2 14.07,9.68 14.07,8.08 13.86,7.87 13.86,7.6 14.21,7.25 16.77,7.25 23.07,13.55 23.07,13.83 21.96,14.94 19.54,14.94 v19.05,14.45
N$33
  Top 0.15: R2_USB.1 20.37,27.68 20.51,27.68 21.2,28.37 21.2,28.93 J4.B5
OUT+  (via drill 0.3)
  Top 0.15: v31.17,5.31 29.3,5.31 IC2.A3 | v7.35,30.45 4.03,30.45 2.78,29.2 1.88,29.2 TP_OP.TP
  Bottom 0.15: v31.17,5.31 33.87,5.31 38.93,10.37 39,10.37 40.59,11.96 40.59,19.51 40.73,19.65 40.73,25.95 37.34,29.34 31.86,29.34 30.76,28.23 25.63,28.23 25.35,28.51 19.26,28.51 18.98,28.23 9.57,28.23 v7.35,30.45
OUT-
  Top 0.15: IC2.C3 28.26,5.24 28.26,4.83 27.99,4.55 27.99,3.1 29.44,1.64 TP_ON.TP
P0.00/XL1  (via drill 0.3)
  Top 0.15: 27.88,25.15 26.88,26.16 23.55,26.16 C17.2 | 27.88,25.15 28.19,24.84 29.79,24.84 U1.P$D2 | v27.36,24.63 27.16,24.43 26.53,24.43 X2.1 | 27.88,25.15 v27.99,25.26
  Bottom 0.15: v27.99,25.26 v27.36,24.63
P0.01/XL2
  Top 0.15: U1.P$F2 29.79,24.43 29.51,24.43 29.37,24.56 28.05,24.56 27.09,25.53 25.15,25.53 24.04,24.43 X2.2 23.97,24.36 23.97,22.07 23.35,21.45 23.35,18.33 23.9,17.78 23.9,17.15 C18.2
P0.13/1.5D  (via drill 0.3)
  Top 0.15: R5.1 10.26,7.18 12.47,7.18 13.17,6.49 13.17,6.42 13.3,6.28 C30.2 13.37,6.28 13.65,6.56 v13.86,6.56 | v28.47,4.41 28.89,4 32.56,4 SW_UP.2
  Bottom 0.15: v28.47,4.41 28.12,4.41 25.98,6.56 v13.86,6.56
P0.14/1.5D
  Top 0.15: C31.2 25.49,6.63 25.15,6.28 24.04,6.28 R8.1 23.97,6.21 23.69,6.21 21.61,4.13 21.61,3.86 SW_ENT.2
P1.01/1.6C
  Top 0.15: R_PWR_EPD.1 8.11,6.84 8.11,6.97 11.51,10.37 11.64,10.37 DMG2305UX-7.1
P1.02/1.6C  (via drill 0.3)
  Top 0.15: 3.71,4.52 7.07,1.16 7.97,1.16 9.36,2.54 9.36,3.23 10.05,3.93 10.54,3.93 SW_DN.2 | 3.71,4.52 1.95,6.28 1.95,7.53 C29.2 | v16.42,17.85 16.42,17.36 R7.1 | v12.89,13.34 v14.55,15.01 | v3.75,4.55 3.71,4.52
  Bottom 0.15: v16.42,17.85 16.42,16.88 v14.55,15.01 | v12.89,13.34 12.54,13.34 v3.75,4.55
PMIC_INT  (via drill 0.35 pad 0.5)
  Top 0.15: v27.6,19.1 26.23,17.73 IC1.A1
  Bottom 0.127: v27.6,19.1 27.6,19.65 U1.P$T2
  other vias: 29.85,21.9
PREVGH  (via drill 0.3)
  Top 0.15: v8.73,8.22 8.73,11.68 10.26,13.21 10.6,13.21 J1.21 | v21.2,5.24 24.73,8.77 D5.1 24.73,8.84 v23.48,10.09 | v23.48,14.18 23.48,15.28 EPD_C9.2
  Bottom 0.15: v8.73,8.22 8.73,7.6 8.18,7.04 8.18,6.77 9.7,5.24 v21.2,5.24 | v23.48,10.09 v23.48,14.18
PREVGL
  Top 0.15: D2.2 21.41,8.84 19.68,8.84 17.81,6.97 17.39,6.97 EPD_C11.2 17.25,6.97 15.38,8.84 13.65,8.84 12.96,9.54 12.96,10.3 11.02,12.24 10.67,12.24 J1.23
RESE
  Top 0.15: 8.49,24.88 9.43,23.94 9.43,22.69 9.84,22.28 10.6,22.28 J1.3 | 8.49,24.88 6.8,26.57 5.62,26.57 R1_EP_DR.2 | 8.49,24.88 9.63,26.02 11.44,26.02 13.03,24.43 13.03,23.39 12.27,22.62 12.27,22.42 Q3.2
RESET  (via drill 0.35 pad 0.5)
  Top 0.127: TP_RESET.TP v31.61,18.99 v31.6,19
  Top 0.15: J2.6 38.23,10.16 37.82,10.16 37.06,10.92 36.71,10.92 31.66,15.98 31.66,16.74 TP_RESET.TP
  Bottom 0.127: v31.6,19 32.6,20 U1.P$AC13
  other vias: 32.6,20.15
SCL/1.4C
  Top 0.15: IC2.C1 28.33,6.28 28.33,6.35 30.69,8.71 31.24,8.71 31.52,8.98 31.52,9.26 U3.7
SCL/2.4C  (via drill 0.3, 0.35 pad 0.5)
  Top 0.127: IC3.12 26.46,22.66 v26.5,22.7
  Top 0.15: v8.8,5.52 8.73,5.45 7.63,5.45 4.23,8.84 3.47,8.84 R17.2 | v6.31,31.07 6.31,32.53 TP1.TP | v22.86,20.13 22.86,21.36 23.32,21.82 R4.1 23.32,22.23 v21.89,23.66
  Top 0.152: v24.45,16.81 26.18,16.81 IC1.B1
  Bottom 0.127: v26.5,22.7 26.7,22.9 28.54,22.9 U1.P$M2
  Bottom 0.15: 23.17,19.82 23.69,20.34 27.02,20.34 28.54,21.86 28.54,22.9 | 23.17,19.82 22.38,19.02 22.38,18.75 24.32,16.81 v24.45,16.81 24.45,12.86 28.95,8.36 28.95,4.27 28.61,3.93 10.6,3.93 9.01,5.52 v8.8,5.52 | 23.17,19.82 v22.86,20.13 | v6.31,31.07 6.31,30.87 13.51,23.66 v21.89,23.66
  other vias: 29.85,22.9
SDA/1.4C  (via drill 0.35 pad 0.5)
  Top 0.127: v28.4,7.7 29.1,8.4 v29.7,8.4 | v31.8,8.4 32.06,8.66 U3.8
  Bottom 0.127: IC2.B2 28.4,6.15 v28.4,7.7 | v29.7,8.4 v31.8,8.4
  other vias: 28.78,5.77
SDA/2.4C  (via drill 0.3, 0.35 pad 0.5)
  Top 0.15: v22.59,13.69 23.62,13.69 23.97,14.04 23.97,14.18 26.12,16.32 26.19,16.32 IC1.C1 | v14.83,8.36 14.34,8.36 13.72,7.74 R18.2 | v24.66,23.18 29.3,23.18 U1.P$L1 | v15.8,17.85 15.8,17.36 R2.1 | v5.55,31.21 3.12,31.21 TP2.TP | v20.16,14.45 19.81,14.8 19.81,15.7 18.57,16.95 18.01,16.95 v17.39,17.57
  Bottom 0.127: IC3.2 24.66,22.73 v24.66,23.18
  Bottom 0.15: 20.16,13.69 v22.59,13.69 | v14.83,8.36 20.16,13.69 | v24.66,23.18 19.12,23.18 16.35,20.41 | 16.35,20.41 15.8,19.85 15.8,18.33 | v15.8,17.85 15.8,18.33 | 16.35,20.41 v5.55,31.21 | v20.16,14.45 20.16,13.69 | v17.39,17.57 16.63,18.33 15.8,18.33
  other vias: 25.94,21.46
SWDCLK  (via drill 0.3)
  Top 0.15: 37.4,20.62 38.65,20.62 38.93,20.34 TP_SWDCLK.TP | 37.4,20.62 35.88,20.62 U1.P$AA24 | v38.86,10.85 39.55,10.16 J2.4 | v37.4,20.55 37.4,20.62
  Bottom 0.15: v38.86,10.85 38.86,11.2 37.4,12.65 v37.4,20.55
SWDIO
  Top 0.15: U1.P$AC24 35.88,20.13 35.88,18.26 36.5,17.64 TP_SWDIO.TP 36.57,17.57 36.85,17.57 40.45,13.97 40.45,12.72 40.17,12.45 40.17,11.2 40.8,10.57 40.8,10.16 J2.2
SWO
  Top 0.15: U1.P$AD22 34.84,17.91 34.22,17.29 TP_SWO.TP
VBAT/1.2A
  Top 0.3: 31.03,11.75 30.34,12.45 29.86,12.45 C27.2 | 31.03,11.75 31.03,11.34 U3.3 31.17,11.27 31.52,11.27 U3.2 | 31.03,11.75 31.17,11.82 31.66,11.82 31.8,11.96 32.35,11.96 32.49,11.82 32.49,7.39 32.21,7.11 TP_VBAT.TP
VBAT/2.5C  (via drill 0.35 pad 0.5)
  Bottom 0.127: C37.1 26.21,15.94 IC1.C2
  other vias: 26.21,14.93 26.63,16.36
VBUS/1.5D  (via drill 0.3)
  Top 0.3: 25.53,28.34 25.42,28.44 25.42,28.93 J4.A4_B9 | 25.53,28.34 25.7,28.16 25.7,27.26 C42.1 | 16.7,28.09 16.7,29.13 16.01,29.83 15.66,29.83 D3.5 | 16.7,28.09 16.7,27.4 C43.1 | 16.7,28.09 19.88,28.09 | 19.88,28.09 20.23,28.09 20.58,28.44 20.58,28.93 J4.A9_B4 | v25.22,28.03 25.53,28.34 | v19.88,28.03 19.88,28.09
  Bottom 0.3: v19.88,28.03 v25.22,28.03
VBUS/2.6D  (via drill 0.3)
  Top 0.15: v27.64,18.19 26.63,17.18 IC1.A2
  Top 0.3: v29.44,19.3 29.79,19.65 U1.P$AD2 | v22.86,18.89 22.24,18.26 C38.1 | v28.19,9.74 28.75,9.19 28.89,9.19 C21.1
  Bottom 0.3: 27.64,18.33 v27.64,18.19 27.64,18.05 28.19,17.5 v28.19,9.74 | 27.64,18.33 28.61,19.3 v29.44,19.3 | v22.86,18.89 23.97,18.89 24.59,19.51 26.39,19.51 27.5,18.4 27.64,18.33
VREG  (via drill 0.3)
  Top 0.15: v24.8,18.95 24.8,19.99 25.22,20.41 25.22,20.75 24.8,21.17 C23.2 24.73,21.17 24.52,21.17 v24.25,21.45 | IC9.A1 18.01,20.34 18.01,20.62 IC9.A2 18.01,21.03 IC9.A3 17.95,21.03 17.53,21.03 | 17.53,21.03 17.39,21.03 15.11,23.32 15.11,23.52 12.82,25.81 C39.1 12.75,25.88 12.34,26.3 9.5,26.3 8.8,25.6 v8.6,25.6 | v8.6,20.62 8.6,20.13 8.94,19.79 8.94,19.58 C24.2 | v7.42,28.72 7.42,29.83 9.91,32.32 9.91,32.73 TP_VREG.TP | v17.53,20.96 17.53,21.03 | IC1.B2 26.68,16.81 v27.09,16.81
  Bottom 0.15: v27.09,16.81 26.95,16.81 v24.8,18.95 | v8.6,20.62 v8.6,25.6 8.6,25.67 7.42,26.85 v7.42,28.72 | v24.25,21.45 18.01,21.45 v17.53,20.96